# Altium PCB GLCD controler.PcbDoc
Units mm, origin at the board's own origin, x right, y up, seen from the top; angles counter-clockwise.
Board outline 93 x 87 mm, 2 copper layers (Top Layer, Bottom Layer); 16 components, 26 nets, 111 pads, 5 vias.
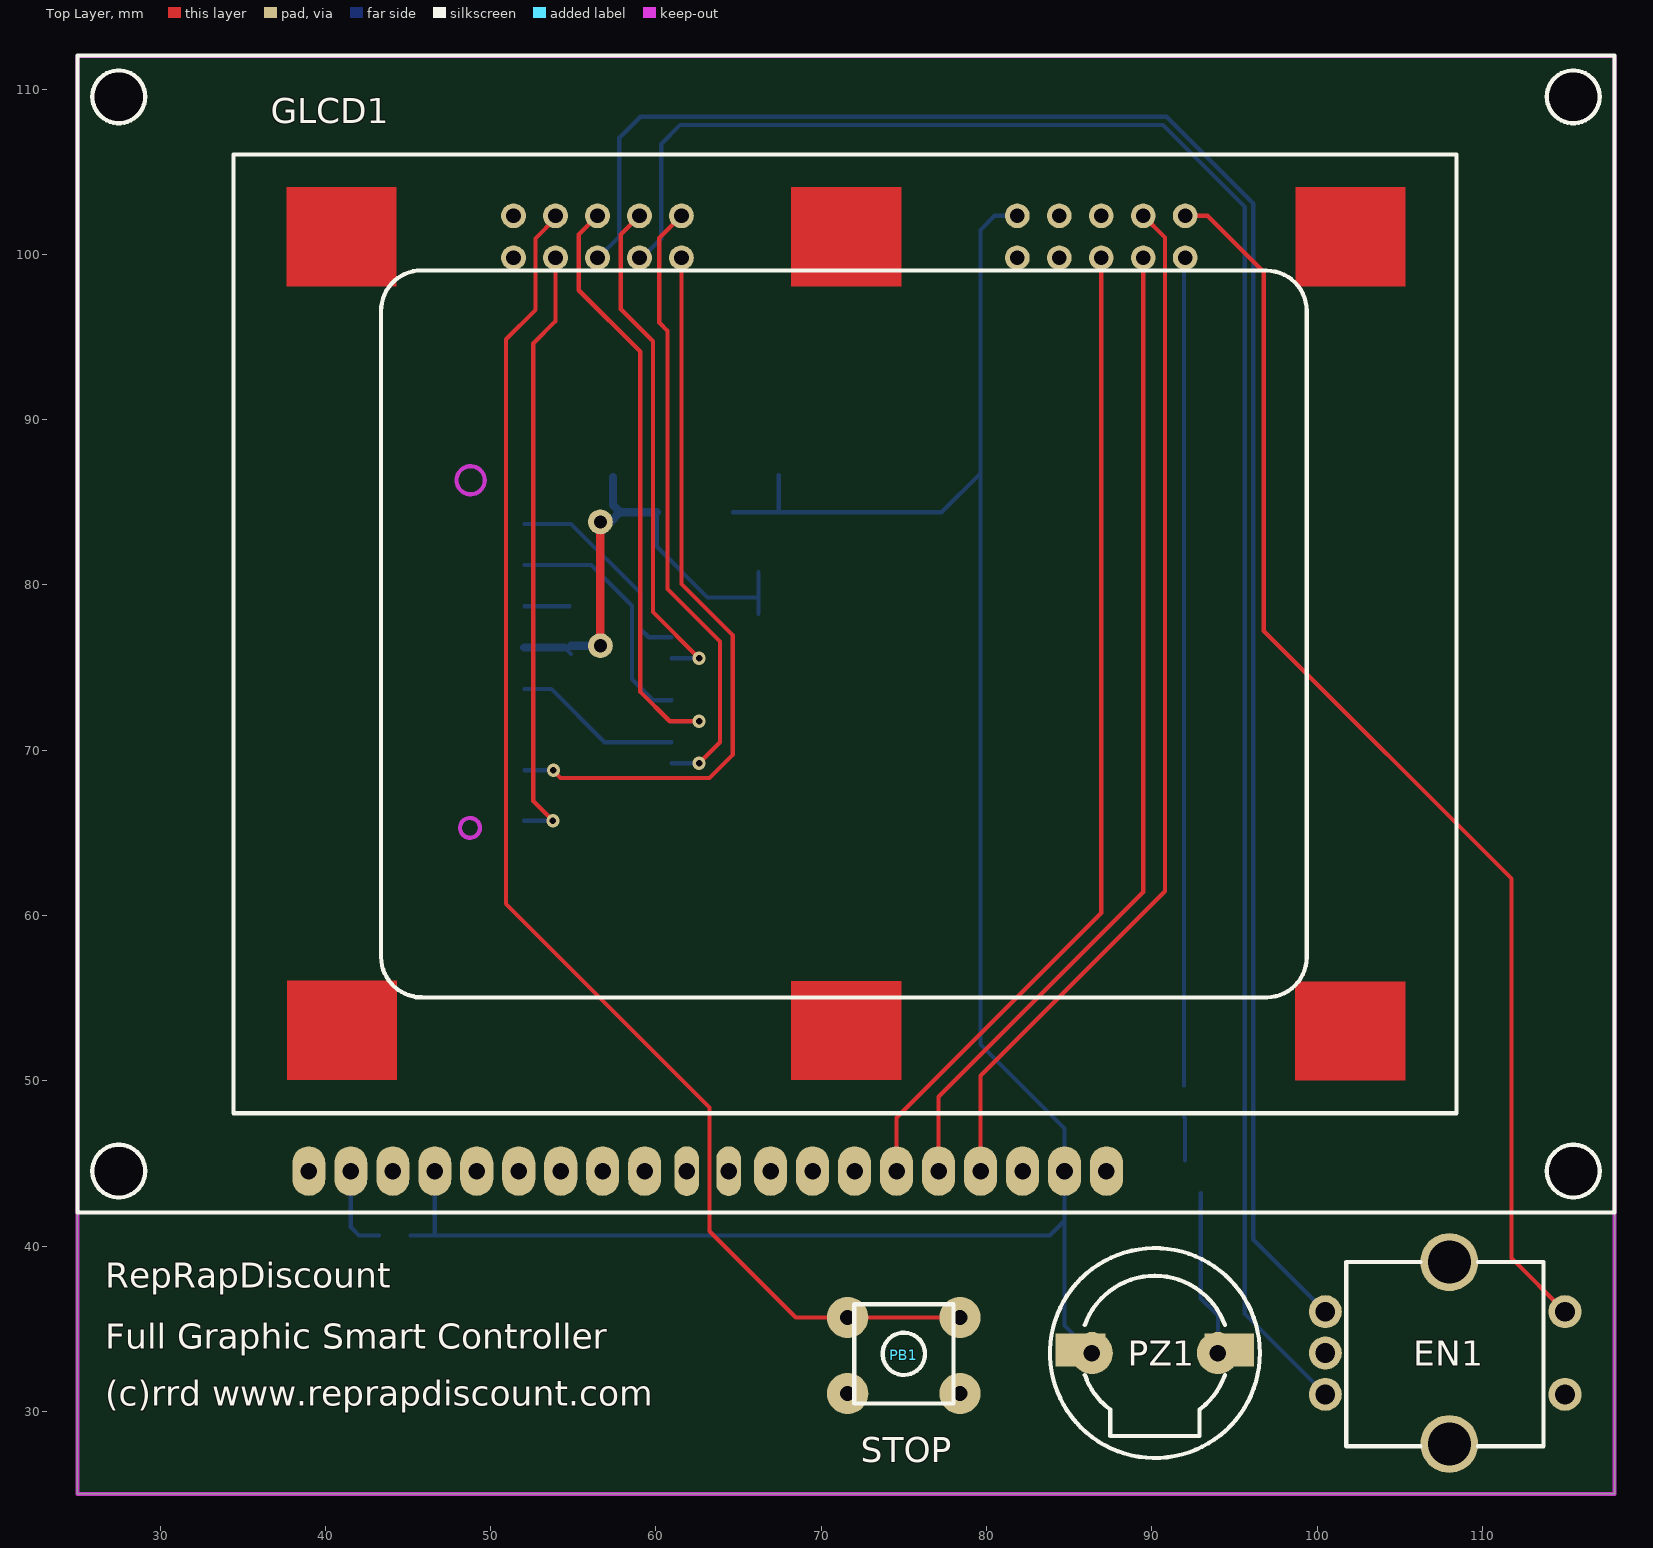
[diagram p0: Top Layer view]
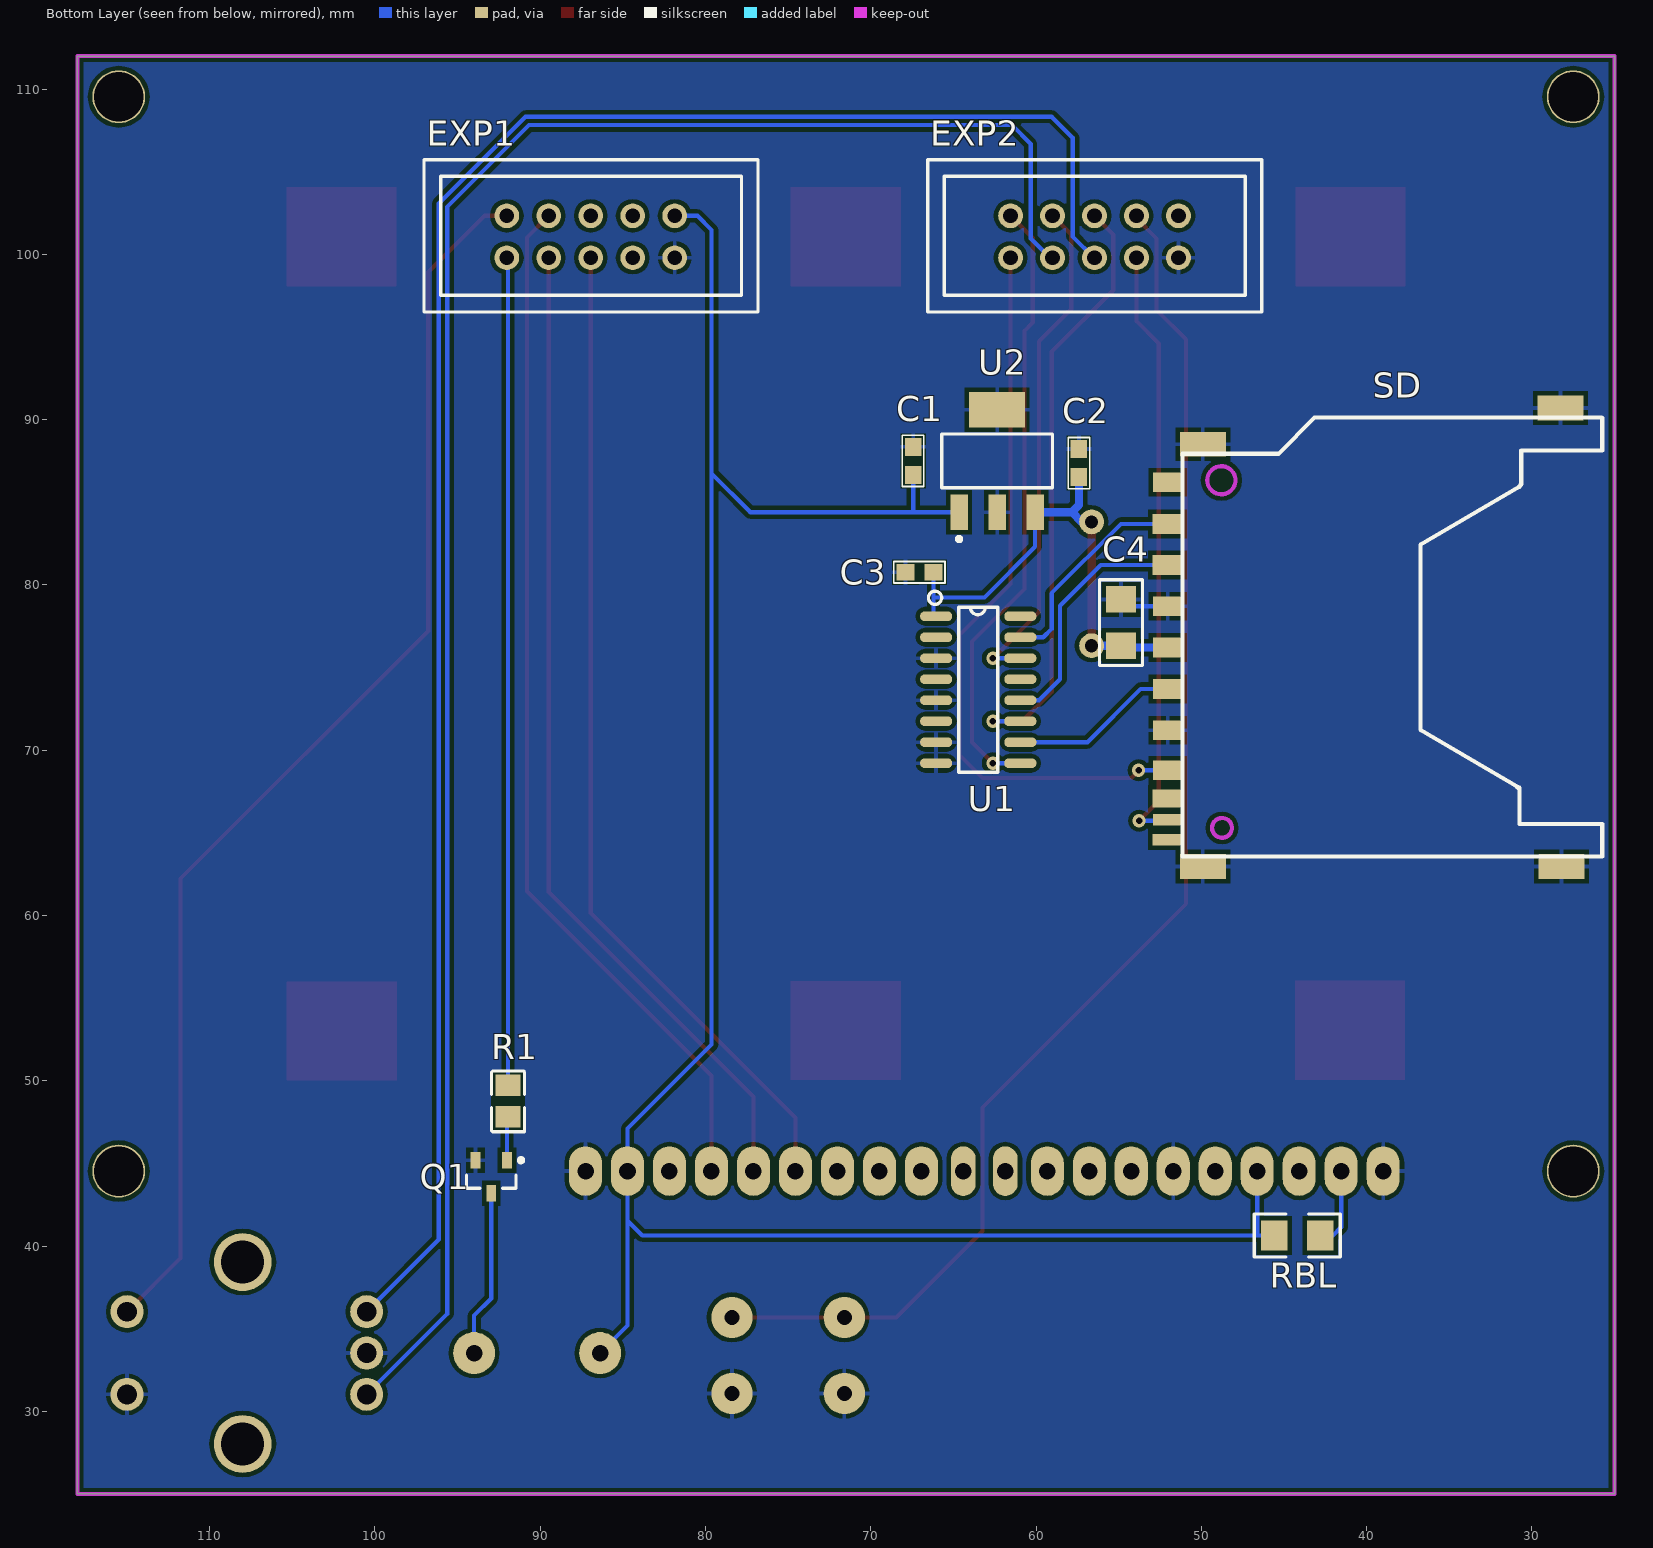
[diagram p1: Bottom Layer view, seen from below]

## Layer stack, top to bottom
Top Layer: signal copper 0.0356
Dielectric: dielectric 0.32, FR-4, Dk 4.8
Bottom Layer: signal copper 0.0356

## Board outline
25,25 25,112 118,112 118,25

## Design rules (kind name [scope] priority, off if disabled: settings)
Clearance [All] p1: gap=0.254
PolygonConnect [All] p1: connectstyle=Relief reliefconductorwidth=0.254 reliefentries=4 polygonreliefangle="90 Angle"
RoutingVias [All] p1: holewidth=0.711 width=1.27 viastyle="Through Hole" minholewidth=0.711 minwidth=1.27 maxholewidth=0.711 maxwidth=1.27
SilkscreenOverComponentPads [All] p1: minsilkscreentomaskgap=0.254
SolderMaskExpansion [All] p1: expansion=0.102
Width [All] p1: maxlimit=1 minlimit=0.254 preferedwidth=0.254 minimp=50.000000 maximp=50.000000 favimp=50.000000
27 further rules are at their usual default settings.

## Components (designator, comment, footprint, x,y, rotation, side; value= is the part's Value field where it differs from the comment)
C1 "100nF" "Cap 1608-0603" 67.437,87.503 r270 bottom
C2 "100nF" "Cap 1608-0603" 57.404,87.376 r270 bottom
C3 "100nF" "Cap 1608-0603" 67.056,80.772 r180 bottom
C4 "1uF" Cap3216-1206 54.864,77.724 r270 bottom
EN1 "BC111E5244B2" "ROTARY ENCODER" 100.5,33.528 r180 top
EXP1 "Header 5X2" HDR2X5_exp 97.028,96.52 r180 bottom
EXP2 "Header 5X2" HDR2X5_exp 66.548,96.52 r180 bottom
GLCD1 "KXM12864M-3" KXM12864M-3 25,42.037 r0 top locked
PB1 "STOP" "SW 6x6mm" 72,30.48 r0 top locked
PZ1 "PIEZO" "PIEZO 11mm" 94,33.528 r180 top locked
Q1 "BC817" SOT23_L 92.964,44.196 r270 bottom
R1 "1K" "Res 2012-0805" 91.948,48.768 r90 bottom
RBL "0" "Res 3216-1206" 44.196,40.64 r0 bottom
SD "SD card" "SD_card socket" 40.132,76.835 r90 bottom locked
U1 "74HC4050" SO16N 63.5,73.66 r180 bottom
U2 "MIC5209" SOT-223 62.357,87.503 r180 bottom

## Footprints (in the part's own frame and the unit in brackets; to place one, negate y for a bottom-side part, rotate by r counter-clockwise, add the part's x,y. Pads: shape width x height; smd on the part's side, far side on the other; paste and mask are expansions set on the pad)
Cap3216-1206 [mm]
  rect 1.6x1.8 smd: 1(-1.4,0) 2(1.4,0)
  silkscreen extent -2.6,-1.3 2.6,1.3, body extent -1.57,-0.85 1.63,0.85, height 1.6
"Cap 1608-0603" [mm]
  rect 1.1x1 smd: 1(-0.85,0) 2(0.85,0)
  silkscreen extent -1.55,-0.65 1.55,0.65, body extent -0.8,-0.4 0.8,0.4, height 0.4
HDR2X5_exp [mm] "Connector; Header; 5x2 Position"
  round 1.5 hole 0.9: 1(5.004,3.277) 2(5.004,5.817) 3(7.544,3.277) 4(7.544,5.817) 5(10.084,3.277) 6(10.084,5.817) 7(12.624,3.277) 8(12.624,5.817) 9(15.164,3.277) 10(15.164,5.817)
  silkscreen extent 0,0 20.2,9.2
KXM12864M-3 [mm]
  round 3.2 hole 3: 0(2.5,2.5) 0(2.5,67.5) 0(90.5,2.5) 0(90.5,67.5)
  oval 2x3 hole 1: 1(62.26,2.5) 2(59.72,2.5) 3(57.18,2.5) 4(54.64,2.5) 5(52.1,2.5) 6(49.56,2.5) 7(47.02,2.5) 8(44.48,2.5) 9(41.94,2.5) 12(34.32,2.5) 13(31.78,2.5) 14(29.24,2.5) 15(26.7,2.5) 16(24.16,2.5) 17(21.62,2.5) 18(19.08,2.5) 19(16.54,2.5) 20(14,2.5)
  oval 1.5x3 hole 1: 10(39.4,2.5) 11(36.86,2.5)
  Top Layer region: 73.67,7.975 80.34,7.975 80.34,13.975 73.67,13.975
  Top Layer region: 43.177,8 49.848,8 49.848,14 43.177,14
  Top Layer region: 12.67,8.025 19.34,8.025 19.34,14.025 12.67,14.025
  Top Layer region: 12.646,56.031 19.317,56.031 19.317,62.031 12.646,62.031
  Top Layer region: 43.177,56.027 49.848,56.027 49.848,62.027 43.177,62.027
  Top Layer region: 73.683,56.027 80.353,56.027 80.353,62.027 73.683,62.027
  silkscreen extent 0,0 93,70
"PIEZO 11mm" [mm]
  rect 3x2 smd: 1(-0.686,-0.178) 2(8.314,-0.178)
  round 2.54 hole 1: 1(0,0) 2(7.62,0)
  silkscreen extent -2.54,-6.35 10.16,6.35
"Res 2012-0805" [mm]
  rect 1.3x1.5 smd: 1(-0.95,0) 2(0.95,0)
  silkscreen extent -1.85,-1 1.82,1, body extent -1,-0.63 1,0.63, height 1.5
"Res 3216-1206" [mm]
  rect 1.6x1.8 smd: 1(-1.4,0) 2(1.4,0)
  silkscreen extent -2.6,-1.3 2.6,1.3, body extent -1.58,-0.85 1.63,0.85, height 1.6
"ROTARY ENCODER" [mm]
  round 2 hole 1.2: 1(0,-2.5) 2(0,0) 3(0,2.5) 4(-14.5,2.5) 5(-14.5,-2.5)
  round 3.5 hole 2.6: 6(-7.5,5.5) 7(-7.5,-5.5)
  silkscreen extent -13.2,-5.51 -1.27,5.64
"SD_card socket" [mm]
  rect 1.2x1.8 smd: 1(6.858,11.917) 2(4.369,11.917) 3(1.875,11.908) 4(-0.625,11.908) 5(-3.125,11.908) 6(-5.625,11.908) 7(-8.05,11.908) 9(9.375,11.908)
  rect 1.1x1.8 smd: 8(-9.754,11.917)
  rect 0.7x1.8 smd: 10(-11.05,11.908) 11(-12.243,11.917)
  rect 1.5x2.8 smd: 12(-13.868,-11.917) 12(-13.868,9.774) 12(11.684,9.774) 12(13.868,-11.866)
  Keep-Out Layer circle w0.254: c-11.532,8.617 r0.6
  Keep-Out Layer circle w0.254: c9.5,8.657 r0.85
  silkscreen extent -13.27,-14.38 13.3,11.02
SO16N [mm] "SOIC, 16-Leads, Body 10.0x4.0mm (max), Pitch 1.27mm, IPC Medium Density"
  oval 1.95x0.6 smd: 1(-2.55,4.445) 2(-2.55,3.175) 3(-2.55,1.905) 4(-2.55,0.635) 5(-2.55,-0.635) 6(-2.55,-1.905) 7(-2.55,-3.175) 8(-2.55,-4.445) 9(2.55,-4.445) 10(2.55,-3.175) 11(2.55,-1.905) 12(2.55,-0.635) 13(2.55,0.635) 14(2.55,1.905) 15(2.55,3.175) 16(2.55,4.445)
  silkscreen extent -3.01,-5 1.18,5.96, body extent -2,-5 2,5, height 1.75
SOT23_L [mm] "SOT23, 3-Leads, Body 2.9x1.3mm, Pitch 0.95mm, Lead Span 2.3mm, IPC High Density"
  rect 1x0.6 smd: 1(-1,0.95) 2(-1,-0.95) 3(1,0)
  silkscreen extent -1.12,-1.5 0.7,1.92, body extent -0.7,-1.5 0.7,1.5, height 1.1
SOT-223 [mm]
  rect 1.05x2.15 smd: 1(-2.3,-3.1) 2(0,-3.1) 3(2.3,-3.1)
  rect 3.4x2.15 smd: 4(0,3.1)
  silkscreen extent -3.35,-4.85 3.35,1.62
"SW 6x6mm" [mm]
  round 2.5 hole 0.9: 1(-0.4,5.2) 1(6.4,5.2) 2(-0.4,0.6) 2(6.4,0.6)
  silkscreen extent 0,0 6,6

## Part data
C1 C2 C3 C4: library part "Cap Semi", "Capacitor (Semiconductor SIM Model)"
EN1: library part Encoder, "Rotary encoder mechanical"
EXP1 EXP2: "Header, 5-Pin, Dual row"
GLCD1: library part "LCD KXM1264M-3", "LCD 12864 ST7920"
PB1: library part SW-PB
Q1: library part BC847C, "NPN General-purpose Transistor"
R1 RBL: library part Res3, "Resistor"
U1: "Hex high-to-low level shifter"
U2: "500mA Low-Noise LDO Regulator"

## Free pads (board coordinates)
  round 1.5 hole 0.8: 1(56.639,76.324) 1(56.639,83.817)

## Via types
v1: diameter 0.8, hole 0.4, Top Layer to Bottom Layer, tented both sides, 5 vias

## Nets (pads, with @x,y where several pads share a name; then routed paths per layer and width w, separated by ;. In a path a pad name is that pad's centre, name@x,y a point inside that pad or via, vN(x,y) a via of type N, cw(c..) or ccw(c..) an arc to the next point about the centre after c; other vN are vias at no path point)
3V3: C2.2 C3.2 C4.2 pad.1 SD.4 U1.1 U2.3 | length 31.6
  Top Layer w0.5: pad.1@56.639,76.324 pad.1@56.639,83.817
  Bottom Layer w0.254: C4.2@54.47,76.21 C4.2@54.864,75.816 ; 60.057,83.072 U2.3 60.057,82.31 63.119,79.248 66.206,79.248 ; U1.1@66.206,78.261 66.206,79.248 ; C3.2 66.206,79.248
  Bottom Layer w0.5: SD.4 C4.2@54.47,76.21 ; C4.2 pad.1@56.639,76.324 ; pad.1@56.639,83.817 57.251,83.817 57.837,84.403 ; C2.2 57.404,84.836 57.837,84.403 ; U2.3 57.837,84.403
BEEPER: EXP1.1 R1.2 | length 50.1
  Bottom Layer w0.254: R1.2 91.948,99.72 EXP1.1
BTN_EN1: EN1.1 EXP2.5 | length 117.7
  Bottom Layer w0.254: EXP2.5 56.49,99.797 57.785,101.092 57.785,107.061 59.055,108.331 90.888,108.331 96.139,103.08 96.139,40.389 EN1.1
BTN_EN2: EN1.3 EXP2.3 | length 119.2
  Bottom Layer w0.254: EXP2.3 59.157,99.797 60.325,100.965 60.325,106.68 61.468,107.823 90.678,107.823 95.631,102.87 95.631,35.897 EN1.3
BTN_ENC: EN1.5 EXP1.2 | length 76.6
  Top Layer w0.254: EXP1.2 93.37,102.337 96.774,98.933 96.774,77.216 111.76,62.23 111.76,39.268 EN1.5
GND: C1.1 C2.1 C3.1 C4.1 EN1.2 EN1.4 EXP1.9 EXP2.9 GLCD1.1 GLCD1.15 GLCD1.20 PB1.2 Q1.2 SD.3 SD.6 SD.12 U1.3 U1.5 U1.7 U1.8 U2.2 U2.4 | length 2.7
  Bottom Layer w0.254: SD.3 C4.1@54.77,78.71
KILL: EXP2.10
LCD4: EXP1.5 GLCD1.6 | length 60.4
  Top Layer w0.254: GLCD1.6 74.56,47.763 86.944,60.147 EXP1.5
LCD5: EXP1.6
LCD6: EXP1.7
LCD7: EXP1.8
LCDE: EXP1.3 GLCD1.5 | length 60.4
  Top Layer w0.254: GLCD1.5 77.1,49.033 89.484,61.417 EXP1.3
LCDRS: EXP1.4 GLCD1.4 | length 63
  Top Layer w0.254: GLCD1.4 79.64,50.303 90.805,61.468 90.805,101.016 EXP1.4
NetGLCD1_19: GLCD1.19 RBL.1 | length 5.3
  Bottom Layer w0.254: GLCD1.19 41.54,41.137 42.037,40.64 RBL.1@43.246,40.64
NetPZ1_1: PZ1.1 Q1.3 | length 10.1
  Bottom Layer w0.254: Q1.3 92.964,36.83 94,35.794 PZ1.1@94,33.528
NetQ1_1: Q1.1 R1.1 | length 2.6
  Bottom Layer w0.254: R1.1 92.014,47.752 Q1.1
NetSD_1: SD.1 U1.15 | length 13
  Bottom Layer w0.254: SD.1 54.864,83.693 59.055,79.502 59.055,77.343 59.563,76.835 U1.15
NetSD_2: SD.2 U1.12 | length 14.9
  Bottom Layer w0.254: SD.2 56.083,81.204 58.547,78.74 58.547,74.295 59.817,73.025 U1.12
NetSD_5: SD.5 U1.10 | length 10.2
  Bottom Layer w0.254: SD.5 53.671,73.71 56.896,70.485 U1.10
PB1_(SCK): EXP2.2 U1.9 | length 37.7
  Top Layer w0.254: EXP2.2@61.544,102.057 EXP2.2 60.198,100.99 60.198,95.885 60.706,95.377 60.706,79.756 63.881,76.581 63.881,70.485 v1(62.611,69.215)
  Bottom Layer w0.254: U1.9 v1(62.611,69.215)
PB2_(MOSI): EXP2.6 U1.11 | length 36.8
  Top Layer w0.254: EXP2.6 55.333,101.206 55.333,97.829 59.055,94.107 59.055,73.533 60.833,71.755 v1(62.611,71.755)
  Bottom Layer w0.254: U1.11 v1(62.611,71.755)
PB3_(MISO): EXP2.1 SD.7 | length 44.8
  Top Layer w0.254: v1@53.721,68.834 54.229,68.326 63.246,68.326 64.643,69.723 64.643,76.962 61.544,80.061 EXP2.1
  Bottom Layer w0.254: SD.7 v1(53.799,68.785)
RESET: EXP2.8 PB1.1 | length 85.1
  Top Layer w0.254: EXP2.8 53.924,102.184 52.705,100.965 52.705,96.647 50.927,94.869 50.927,60.706 63.246,48.387 63.246,40.894 68.46,35.68 71.6,35.68 PB1.1@78.4,35.68
SD_CSEL: EXP2.4 U1.14 | length 30.9
  Top Layer w0.254: EXP2.4 57.873,101.206 57.873,96.686 59.817,94.742 59.817,78.359 v1(62.611,75.565)
  Bottom Layer w0.254: U1.14 v1(62.611,75.565)
SD_DET: EXP2.7 SD.10 | length 36.9
  Top Layer w0.254: v1(53.769,65.736) 52.578,66.927 52.578,94.615 53.924,95.961 EXP2.7
  Bottom Layer w0.254: SD.10@52.01,65.736 v1(53.769,65.736)
VCC: C1.2 EXP1.10 GLCD1.2 GLCD1.17 PZ1.2 RBL.2 U2.1 | length 135.4
  Bottom Layer w0.254: RBL.2@45.146,40.64 46.62,40.64 ; GLCD1.17 46.62,40.64 ; U2.1 67.437,84.403 ; C1.2 67.437,84.403 ; EXP1.10 80.493,102.337 79.629,101.473 79.629,86.741 ; PZ1.2@86.38,33.528 84.72,35.188 84.72,41.529 ; 46.62,40.64 83.831,40.64 84.72,41.529 ; 67.437,84.403 77.291,84.403 79.629,86.741 ; 79.629,86.741 79.629,52.197 84.72,47.106 GLCD1.2 84.72,41.529
pads on no net: EN1.6 EN1.7 GLCD1.0 GLCD1.3 GLCD1.7 GLCD1.8 GLCD1.9 GLCD1.10 GLCD1.11 GLCD1.12 GLCD1.13 GLCD1.14 GLCD1.16 GLCD1.18 SD.8 SD.9 SD.11 U1.2 U1.4 U1.6 U1.13 U1.16

## Polygon pours and split planes (outlines as drawn)
GND on Bottom Layer "Bottom Layer-No Net" (solid, pour order 1000): 25,112 117.887,112 118,111.887 118,25 25.635,25 25.019,24.384

## Keep-outs
Keep-Out Layer:
  the board outline again, w0.254

## Silkscreen, mask and mechanical layers (free items; w line width, h text height)
Top Overlay:
  text "RepRapDiscount" at 26.67,37.465 h1.52
  text "Full Graphic Smart Controller" at 26.67,33.782 h1.52
  text "(c)rrd www.reprapdiscount.com" at 26.67,30.353 h1.52

## Dimensions
115.5,109.537 to 27.5,109.537 on Top Overlay